# Altium PCB smart home3-2.PcbDoc
Units mm, origin at the board's own origin, x right, y up, seen from the top; angles counter-clockwise.
Board outline 151 x 86.38 mm, 2 copper layers (Top Layer, Bottom Layer); 23 components, 25 nets, 65 pads, 0 vias.
Unrouted connection lines stored in the file: 1.
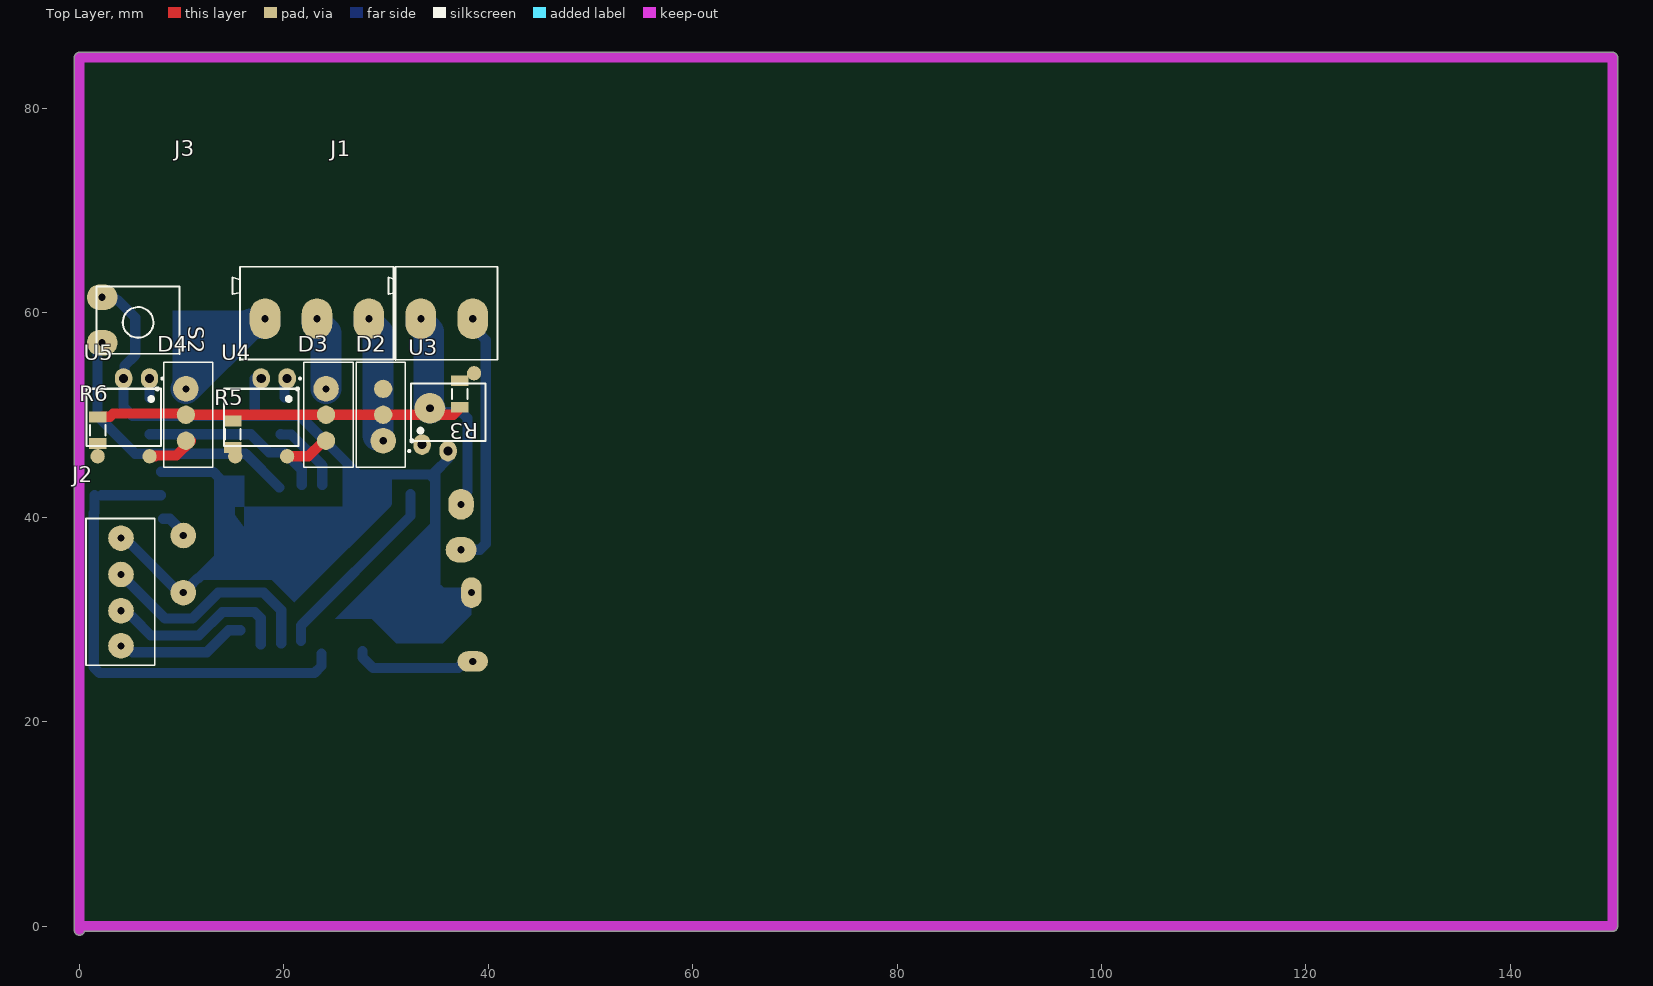
[diagram p0: Top Layer view]
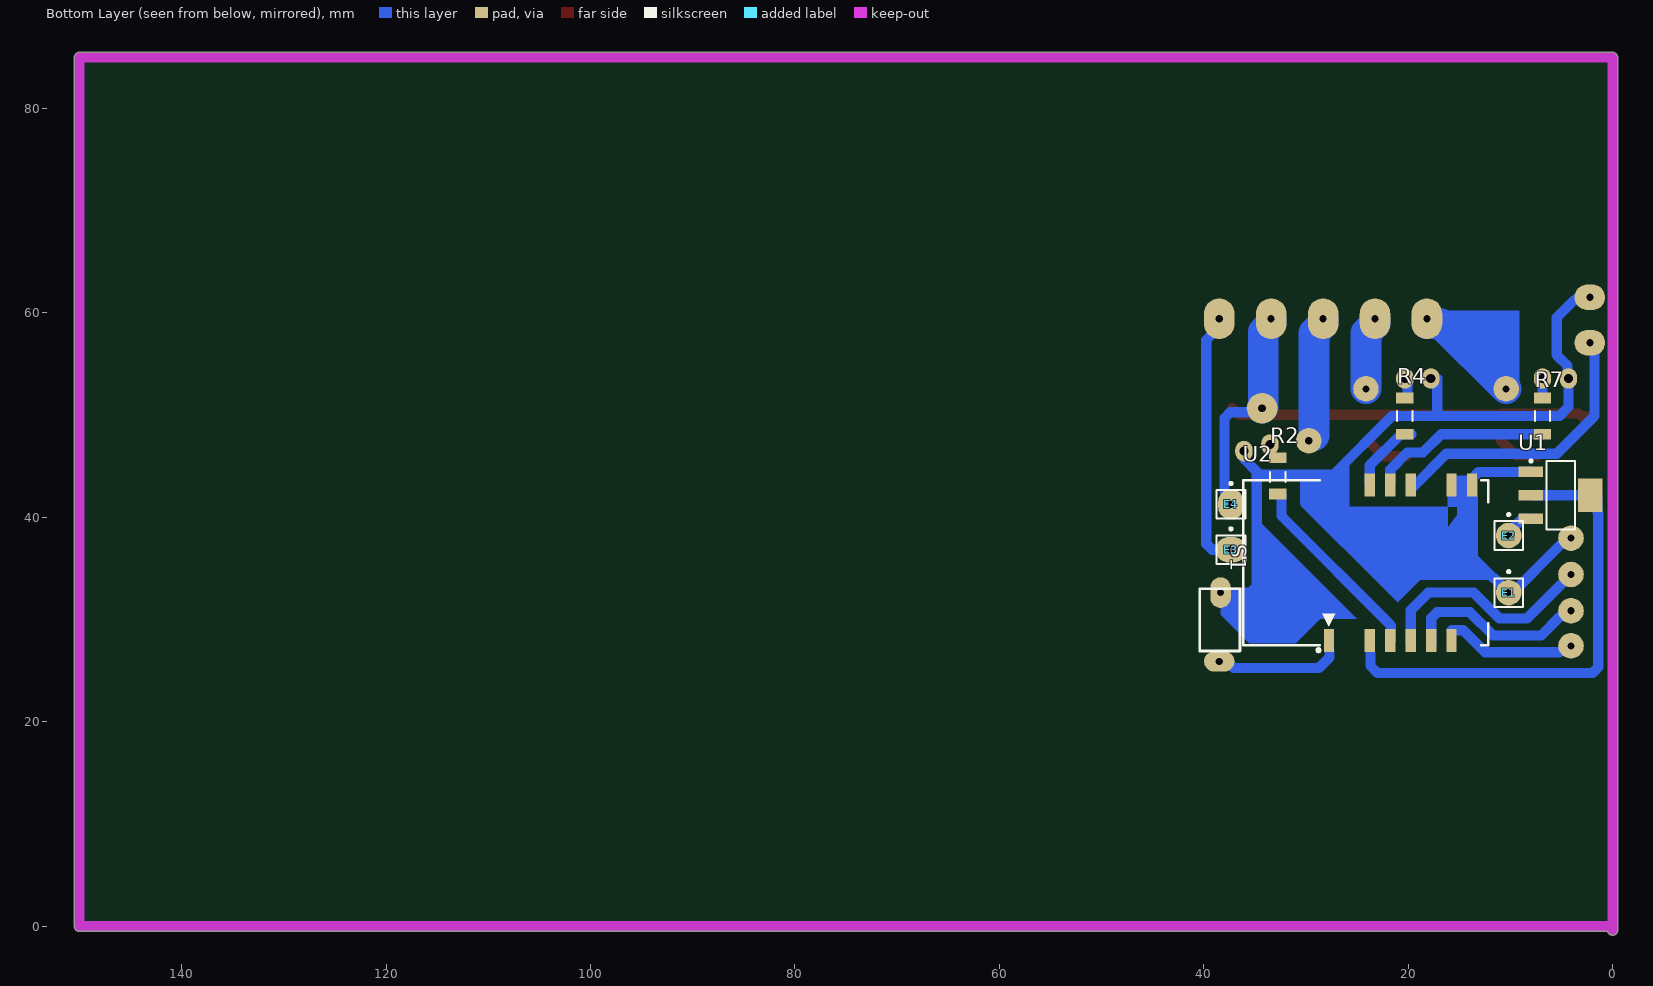
[diagram p1: Bottom Layer view, seen from below]
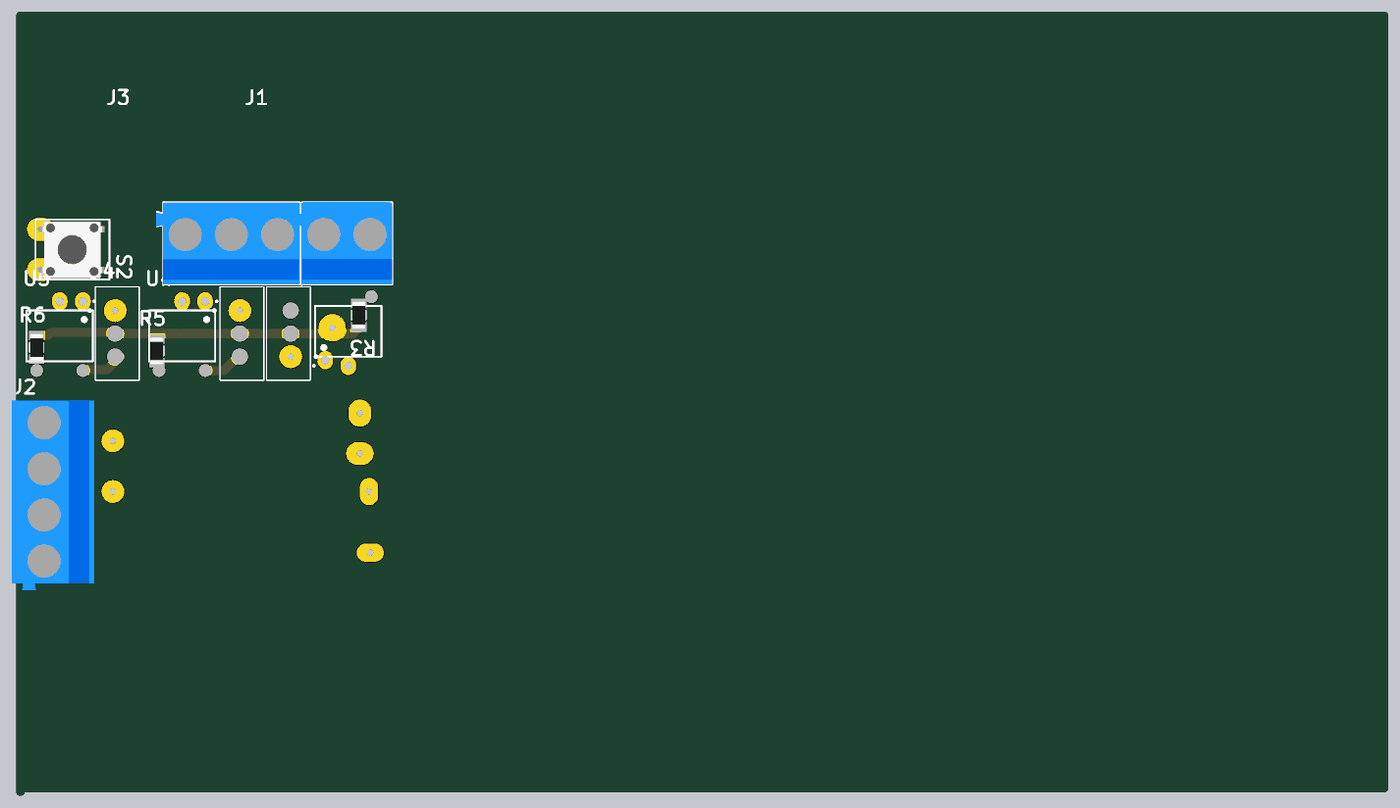
[diagram p2: 3D render of the assembled board from above, using the file's embedded part models]
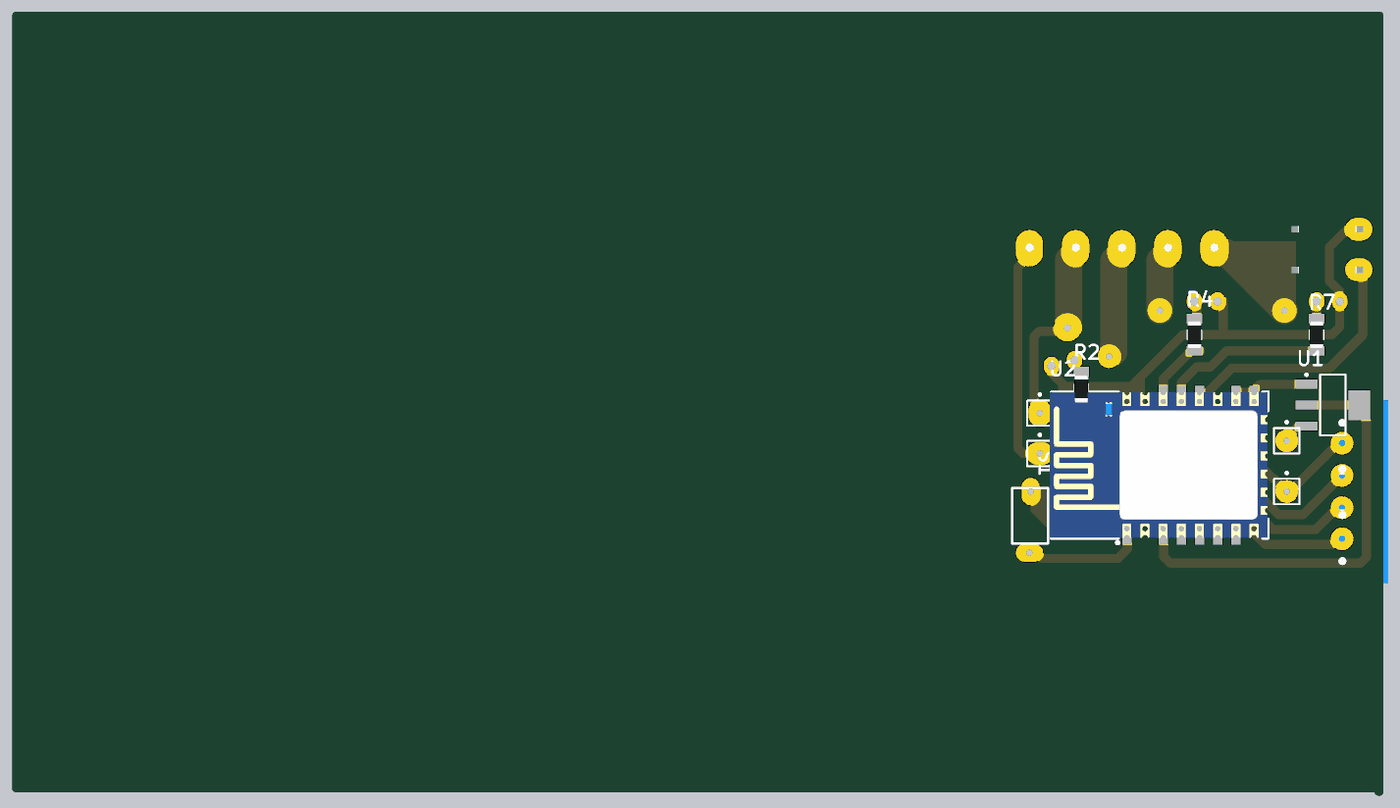
[diagram p3: 3D render of the assembled board from below, using the file's embedded part models]

## Layer stack, top to bottom
Top Solder: solder mask 0.0102, Solder Resist, Dk 3.5
Top Layer: signal copper 0.0356
Dielectric 1: dielectric 0.32, FR-4, Dk 4.8
Bottom Layer: signal copper 0.0356
Bottom Solder: solder mask 0.0102, Solder Resist, Dk 3.5

## Board outline
-0.5,-0.381 -0.5,85 cw(c0,85) 0,85.5 150,85.5 cw(c150,85) 150.5,85 150.5,0 cw(c150,0) 150,-0.5 0.486,-0.5 cw(c0,-0.381)

## Design rules (kind name [scope] priority, off if disabled: settings)
Clearance Clearance_1 [InPolygon] p1: gap=0.8 ignorepadtopadclearanceinfootprint=FALSE
Clearance [All] p2: gap=0.254 ignorepadtopadclearanceinfootprint=FALSE except(0: Arc-Hole Track-Hole SMDPad-Hole THPad-Hole Via-Hole Fill-Hole Poly-Hole Region-Hole Text-Hole)
PolygonConnect [All] p1: connectstyle=Relief reliefconductorwidth=0.254 reliefentries=4 polygonreliefangle="90 Angle" airgapwidth=0.254
RoomDefinition "smart home3-2" [InComponentClass('smart home3-2')] p1: confinementstyle=ConfineIn formatcopy=TRUE lockcomponents=FALSE outline 144.907,-4.953 247.904,-4.953 247.904,23.114 144.907,23.114
RoutingLayers [All] p1: top layer_v5=FALSE bottom layer_v5=TRUE
RoutingVias [All] p1: holewidth=0.711 width=2.5 viastyle="Through Hole" minholewidth=0.711 minwidth=1.27 maxholewidth=0.711 maxwidth=2
SolderMaskExpansion [All] p1: expansion=0.102 istentingtop=FALSE
Width [All] p1: maxlimit=3 minlimit=0.5 preferedwidth=1
29 further rules are at their usual default settings.

## Components (designator, comment, footprint, x,y, rotation, side; value= is the part's Value field where it differs from the comment)
D2 "BTA16-600CW3G" *TO254P1028X482X1968-3 29.718,47.498 r90 top
D3 "BTA16-600CW3G" *TO254P1028X482X1968-3 24.13,52.578 r270 top
D4 "BTA16-600CW3G" *TO254P1028X482X1968-3 10.414,52.578 r270 top
E1 "Antenna" PIN1#1 10.16,32.639 r180 bottom
E2 "Antenna" PIN1#1 10.16,38.227 r180 bottom
E3 "Antenna" PIN1#2 37.338,36.83 r180 bottom
E4 "Antenna" PIN1#3 37.338,41.275 r180 bottom
J1 "TBlock-2" "KF300-2 PIN" 33.401,59.436 r90 top
J2 "TBlock-4" "KF300-4 PIN" 4.064,25.019 r180 top
J3 "TBlock-3" "KF300-3 PIN" 18.161,59.436 r90 top
R2 "10K" "RES 1206 (3216X08L)"#1 32.766,43.942 r90 bottom
R3 "10K" "RES 1206 (3216X08L)"#2 37.211,52.07 r270 top
R4 "10K" "RES 1206 (3216X08L)"#3 20.32,49.911 r90 bottom
R5 "10K" "RES 1206 (3216X08L)"#2 14.986,48.133 r90 top
R6 "10K" "RES 1206 (3216X08L)"#2 1.778,48.514 r90 top
R7 "10K" "RES 1206 (3216X08L)"#3 6.858,49.911 r90 bottom
S1 "PB-2pin" PB-2pin 41.529,33.02 r270 bottom
S2 "PUSH BUTTON DOUBLE" "PUSH BUTTON" 5.715,59.309 r180 top
U1 "LM1117MP-3.3" MP04A_N 5.08,42.164 r180 bottom
U2 "ESP_12_E" ESP_12_E 27.748,27.555 r90 bottom
U3 "K3021P" DIP762W50P254L730H410Q6#1 36.068,50.292 r90 top
U4 "K3021P" DIP762W50P254L730H410Q6#2 17.78,49.784 r270 top
U5 "K3021P" DIP762W50P254L730H410Q6#2 4.318,49.784 r270 top

## Footprints (in the part's own frame and the unit in brackets; to place one, negate y for a bottom-side part, rotate by r counter-clockwise, add the part's x,y. Pads: shape width x height; smd on the part's side, far side on the other; paste and mask are expansions set on the pad)
*TO254P1028X482X1968-3 [mm]
  round 2.5 hole 0.7: 1(0,0)
  round 1.79 smd: 2(2.54,0) 3(5.08,0)
  silkscreen extent -2.6,-2.9 7.68,2.64
DIP762W50P254L730H410Q6#1 [mm]
  oval 2x1.7 hole 0.9: 1(-3.175,2.54) 2(-3.81,0)
  round 1.4 smd: 4(3.81,-2.54)
  silkscreen extent -3.9,-3.65 2.8,3.9
DIP762W50P254L730H410Q6#2 [mm]
  oval 2x1.7 hole 0.9: 1(-3.81,2.54) 2(-3.81,0)
  round 1.4 smd: 4(3.81,-2.54) 6(3.81,2.54)
  silkscreen extent -3.9,-3.65 2.8,3.9
ESP_12_E [mm] "ESP-12 Wi-Fi Module by AI-Thinker"
  rect 2.25x1 smd: 1(0.375,0) 3(0.375,-4) 4(0.375,-6) 5(0.375,-8) 6(0.375,-10) 7(0.375,-12) 15(15.625,-14) 16(15.625,-12) 18(15.625,-8) 19(15.625,-6) 20(15.625,-4)
  silkscreen extent -0.7,-15.57 16.08,8.37, body extent 0,-15.49 16,8.51, height 2.75
"KF300-2 PIN" [mm]
  oval 4x3 hole 0.7: 1(0,0) 2(0,-5.08)
  silkscreen extent -4.06,-7.49 5.08,3.18, body extent -3.99,-7.5 5.08,3.24, height 12.52
"KF300-3 PIN" [mm]
  oval 4x3 hole 0.7: 1(0,0) 2(0,-5.08) 3(0,-10.16)
  silkscreen extent -4.06,-12.57 5.08,3.18, body extent -4,-12.57 5.07,3.25, height 12.78
"KF300-4 PIN" [mm]
  round 2.5 hole 0.7: 1(0,-2.413) 2(0,-5.842) 3(0,-9.398) 4(0,-12.954)
  silkscreen extent -3.3,-14.86 3.43,-0.51, body extent -4.04,-17.65 5.03,3.25, height 12.52
MP04A_N [mm] "SOT223, 4-Leads, Body 6.5x3.5mm, Pitch 2.3mm, Lead Span 7mm, IPC Medium Density"
  rect 2.4x1 smd: 1(-2.9,2.3) 2(-2.9,0) 3(-2.9,-2.3)
  rect 2.4x3.3 smd: 4(2.9,0)
  silkscreen extent -3.03,-3.35 1.4,3.47, body extent -1.85,-3.35 1.85,3.35, height 1.8
PB-2pin [mm] "Switch"
  oval 3x2 hole 0.7: 1(0.381,3.175)
  oval 2x3 hole 0.7: 2(7.112,3.048)
  silkscreen extent 0,1.14 6.1,5.08
PIN1#1 [mm] "Generic Antenna; 1 Lead"
  round 2.5 hole 0.7: 1(0,0)
  silkscreen extent -1.4,-1.4 1.4,2.17
PIN1#2 [mm] "Generic Antenna; 1 Lead"
  oval 3x2.5 hole 0.7: 1(0,0)
  silkscreen extent -1.4,-1.4 1.4,2.17
PIN1#3 [mm] "Generic Antenna; 1 Lead"
  oval 2.5x3 hole 0.7: 1(0,0)
  silkscreen extent -1.4,-1.4 1.4,2.17
"PUSH BUTTON" [mm]
  oval 3x2.5 hole 0.7: 2(3.492,2.223) 4(3.492,-2.222)
  silkscreen extent -4.06,-3.3 4.06,3.3, body extent -3.93,-3.08 3.99,3.12, height 5.21
"RES 1206 (3216X08L)"#1 [mm] "Chip Resistor, 2-Leads, Body 3.2x1.6mm, IPC High Density _ (0.125 W)"
  rect 1.05x1.7 smd: 1(-1.651,0) 2(1.905,0)
  silkscreen extent -0.5,-0.75 0.5,0.75, body extent -1.52,-0.76 1.53,0.76, height 0.6
"RES 1206 (3216X08L)"#2 [mm] "Chip Resistor, 2-Leads, Body 3.2x1.6mm, IPC High Density _ (0.125 W)"
  rect 1.05x1.7 smd: 1(-1.295,0) 2(1.301,0)
  silkscreen extent -0.5,-0.75 0.5,0.75, body extent -1.52,-0.76 1.53,0.76, height 0.6
"RES 1206 (3216X08L)"#3 [mm] "Chip Resistor, 2-Leads, Body 3.2x1.6mm, IPC High Density _ (0.125 W)"
  rect 1.05x1.7 smd: 1(-1.778,0) 2(1.778,0)
  silkscreen extent -0.5,-0.75 0.5,0.75, body extent -1.52,-0.76 1.53,0.76, height 0.6

## Part data
D2 D3 D4: "TRIAC Standard 600V 16A Through Hole TO-220AB", Package="TO-220 ON Semiconductor", Arrow_Americas-Purchase-URL=https://snapeda.com/shop?store=Arrow+Americas&id=390940, Availability=Unavailable, DigiKey-Purchase-URL=https://snapeda.com/shop?store=DigiKey&id=390940, MF="Littelfuse Inc.", Mouser-Purchase-URL=https://snapeda.com/shop?store=Mouser&id=390940, MP=BTA16-600CW3G, Price=None, SnapEDA_Link=https://www.snapeda.com/parts/BTA16-600CW3G/Littelfuse%20Inc./view-part/390940/?ref=snap
E1 E2 E3 E4: "Generic Antenna", LatestRevisionDate=17-Jul-2002, LatestRevisionNote="Re-released for DXP Platform.", PackageReference=PIN1, Published=24-Mar-1999, Publisher="Altium Limited"
R2 R3 R4 R5 R6 R7: library part Resistor, "Resistor", Power="1/4 W", Tolerance=5%
S1 S2: "Switch"
  S1: Designer="Seyed Mohsen Ghasemian", E-mail=picpars@gmail.com, Publisher=www.picpars.com, WEB=www.picpars.com
U1: "800mA Low-Dropout Linear Regulator", DigiKeyPartNumber=LM1117MP-3.3CT-ND, Manufacturer="National Semiconductor", PackageTopMarking=XYTT*N05A, PowerWise=N, Code_IPC=SOT223-4, Code_JEDEC=TO-261-AA, ComponentLink1Description="LM1117 Datasheet", ComponentLink1URL=http://www.national.com/ds/LM/LM1117.pdf, ComponentLink2Description="LM1117 Web Page", ComponentLink2URL=http://www.national.com/pf/LM/LM1117.html, ComponentLink3Description="MP04A Package Page", ComponentLink3URL=http://www.national.com/packaging/folders/mp04a.html, CompType="LDO IC", DatasheetVersion=Apr-2006, PackageDescription="Molded SOT-223, 6.50 x 3.56 x 1.6mm Body, 4 Lead, 2.3mm Pitch", PackageReference=MP04A, PackageVersion="revB, Apr-2003", PartNumber=LM1117MP-3.3, PinCount=4, Published=4-Dec-2008, Publisher="Altium Limited", RoHS=O
U2: "ESP-12 Wi-Fi Module by AI-Thinker", IC=ESP8266-EX, Vendor=Ai-thinker
U3 U4 U5: "Optoisolator Triac Output 5300Vrms 1 Channel 6-DIP", Package="DIP-6 Vishay", Availability=Unavailable, DigiKey-Purchase-URL=https://snapeda.com/shop?store=DigiKey&id=291595, MF="Vishay Semiconductor", Mouser-Purchase-URL=https://snapeda.com/shop?store=Mouser&id=291595, MP=K3021P, Price=None, SnapEDA_Link=https://www.snapeda.com/parts/K3021P/Vishay%20Semiconductor%20Opto%20Division/view-part/291595/?ref=snap

## Free pads (board coordinates)
  round 3 hole 0.762: 2(34.29,50.673)

## Nets (pads, with @x,y where several pads share a name; then routed paths per layer and width w, separated by ;. In a path a pad name is that pad's centre, name@x,y a point inside that pad or via, vN(x,y) a via of type N, cw(c..) or ccw(c..) an arc to the next point about the centre after c; other vN are vias at no path point)
btn: S2.2 U2.18 | length 27.9
  Bottom Layer w1: S2.2@1.778,57.15 1.778,49.911 5.461,46.228 16.256,46.228 U2.18@19.558,42.926
faz: D2.2 D3.2 D4.2 E4.1 J1.1 pad.2 R3.2 R5.2 R6.2 | length 57.3
  Top Layer w1: R6.2@2.286,49.815 2.311,49.84 2.979,49.84 3.304,50.165 10.795,50.165 10.922,50.038 23.241,50.038 28.829,50.038 36.576,50.038 R3.2@37.211,50.673
  Bottom Layer w1: pad.2 34.673,50.29 37.387,50.29 37.973,49.705 37.973,42.566 37.338,41.931 E4.1
  Bottom Layer w3: J1.1 33.401,58.936 34.163,58.174 34.163,50.8 pad.2
GND: E1.1 J2.4 S1.1 S2.4 U1.1 U2.15 U2.16 U3.2 U4.2 U5.2 | length 112.6
  Bottom Layer w1: S2.4@2.222,62.039 2.878,62.039 3.704,61.214 3.81,61.214 5.461,59.563 5.461,55.88 4.395,54.814 4.395,53.671 U5.2 4.318,50.8 5.207,49.911 17.272,49.911 ; 5.19,37.228 9.779,32.639 E1.1 ; U1.1 8.973,44.464 8.987,44.45 13.081,44.45 13.748,43.783 14.732,42.799 14.732,37.465 14.732,37.109 ; E1.1@10.731,33.21 11.587,34.066 11.689,34.066 14.732,37.109 ; U4.2@17.145,53.594 17.145,50.038 17.272,49.911 ; 30.099,43.815 30.099,41.402 26.162,37.465 15.088,37.465 14.732,37.109 ; 34.544,33.528 35.433,32.639 S1.1 ; 34.544,43.915 34.263,44.196 30.099,44.196 27.305,44.196 21.59,49.911 17.272,49.911 ; 34.805,33.267 34.805,43.915 34.805,44.457 U3.2@36.056,45.708
NetD2_1: D2.1 J3.3 | length 11.8
  Bottom Layer w3: J3.3 28.321,58.936 29.21,58.047 D2.1@29.21,48.006
NetD2_3: D2.3
NetD3_1: D3.1 J3.2 | length 7.2
  Bottom Layer w3: J3.2 23.241,58.936 24.13,58.047 D3.1
NetD3_3: D3.3 U4.6 | length 4.3
  Top Layer w1: U4.6@20.193,45.974 22.401,45.974 23.749,47.322 D3.3@23.749,47.498
NetD4_1: D4.1 J3.1 | length 10.9
  Bottom Layer w3: D4.1 16.772,58.936 18.161,58.936 J3.1
NetD4_3: D4.3 U5.6 | length 4.2
  Top Layer w1: U5.6@7.366,45.974 7.443,46.051 9.475,46.051 D4.3@10.922,47.498
NetE3_1: E3.1 J1.2 | length 24.1
  Bottom Layer w1: E3.1@38.481,36.83 39.165,36.83 39.751,37.416 39.751,57.35 38.481,58.62 J1.2
NetR2_2: R2.2 U3.1
NetR3_1: R3.1 U3.4
NetR4_2: R4.2 U4.1 | length 1.9
  Bottom Layer w1: R4.2@20.066,51.763 U4.1@20.066,53.668
NetR5_1: R5.1 U4.4
NetR6_1: R6.1 U5.4
NetR7_2: R7.2 U5.1 | length 1.9
  Bottom Layer w1: R7.2 U5.1
o1: R7.1 U2.19 | length 17.8
  Bottom Layer w1: R7.1 16.764,48.133 18.542,46.355 20.066,46.355 21.748,44.673 U2.19
o2: R4.1 U2.20 | length 7.2
  Bottom Layer w1: R4.1@19.685,48.133 19.71,48.108 20.726,48.108 23.748,45.086 U2.20
o3: R2.1 U2.4 | length 18.8
  Bottom Layer w1: U2.4@21.686,27.93 21.686,29.433 32.385,40.132 R2.1@32.385,42.291
rst: S1.2 U2.1 | length 12.1
  Bottom Layer w1: U2.1@27.686,26.924 27.686,26.299 28.712,25.273 37.075,25.273 37.71,25.908 S1.2
s1: J2.3 U2.5 | length 21.4
  Bottom Layer w1: J2.3@4.837,33.644 8.382,30.099 11.049,30.099 13.589,32.639 18.034,32.639 19.748,30.925 U2.5@19.748,27.686
s2: J2.2 U2.6 | length 17.1
  Bottom Layer w1: 5.207,30.226 6.985,28.448 11.684,28.448 13.97,30.734 17.162,30.734 17.748,30.148 U2.6@17.748,27.559
s3: J2.1 U2.7 | length 11.4
  Bottom Layer w1: 5.207,26.797 12.446,26.797 14.605,28.956 U2.7@15.748,28.956
vDD: E2.1 U1.3 | length 2.8
  Bottom Layer w1: U1.3@8.175,39.864 8.824,39.864 10.16,38.528 E2.1
vesp: U1.2 U1.4 U2.3 | length 46.7
  Bottom Layer w1: U1.4@1.48,42.164 1.48,40.511 1.397,40.428 1.397,25.351 1.983,24.765 22.987,24.765 23.686,25.464 23.686,26.67 ; U1.4 U1.2

## Keep-outs
Keep-Out Layer:
  lines w1: 0,-0.381 0,85 150,85 150,0 0,0

## Other copper
Bottom Layer:
  region net NetD4_1: 9.144,52.959 9.144,60.198 16.51,60.198 17.018,59.69
  region net GND: 34.544,39.624 25.019,30.099 28.575,30.099 30.988,27.686 35.56,27.686 38.354,30.48 38.354,32.639 34.925,32.639 34.798,32.766
  region net GND: 14.605,41.021 25.781,41.021 25.781,45.339 25.908,45.466 27.178,44.196 29.845,44.196 30.099,43.942 30.099,40.767 26.543,37.211 21.018,31.686 18.796,33.909 11.557,33.909 13.208,35.56 13.208,43.942 13.335,43.942 13.462,44.069 16.129,44.069 16.129,38.989
  region: 18.669,43.688
  region: 19.685,43.688
  region: 29.591,43.434

## Text inside footprints (layer, text, board x,y; h text height)
U2: Mechanical 13 "ANTENNA AREA" at 35.622,27.682 h0.25 r270; Mechanical 13 "CUTOUT POLYGON" at 35.114,27.682 h0.25 r270